# Altium PCB PCB.PcbDoc
Units mm, origin at the board's own origin, x right, y up, seen from the top; angles counter-clockwise.
Board outline 12 x 15 mm, 2 copper layers (Top Layer, Bottom Layer), stack 1.671 mm thick; 12 components, 8 nets, 37 pads, 10 vias.
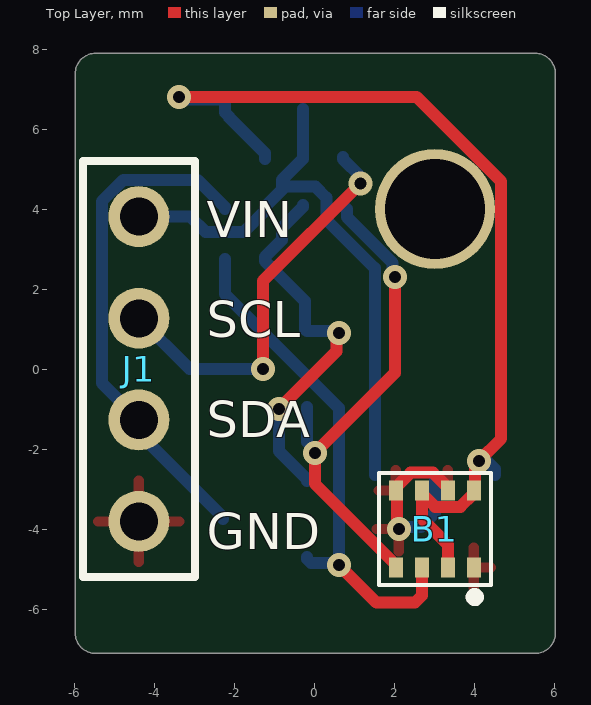
[diagram p0: Top Layer view]
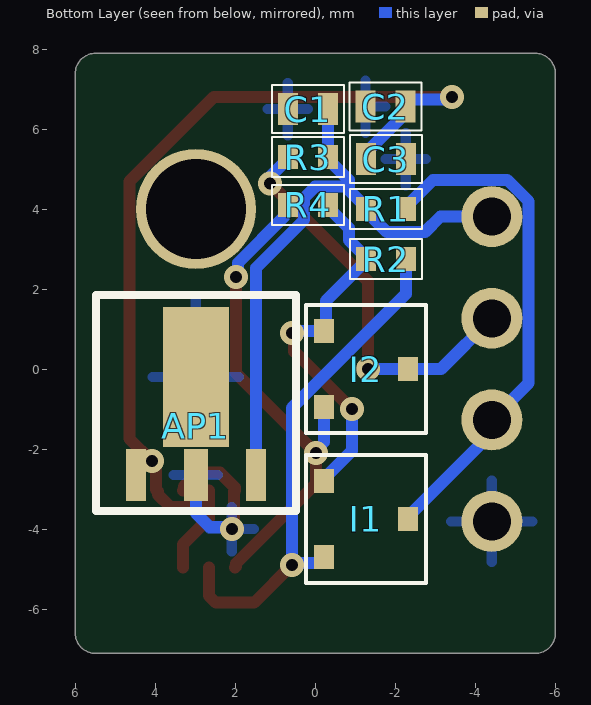
[diagram p1: Bottom Layer view, seen from below]
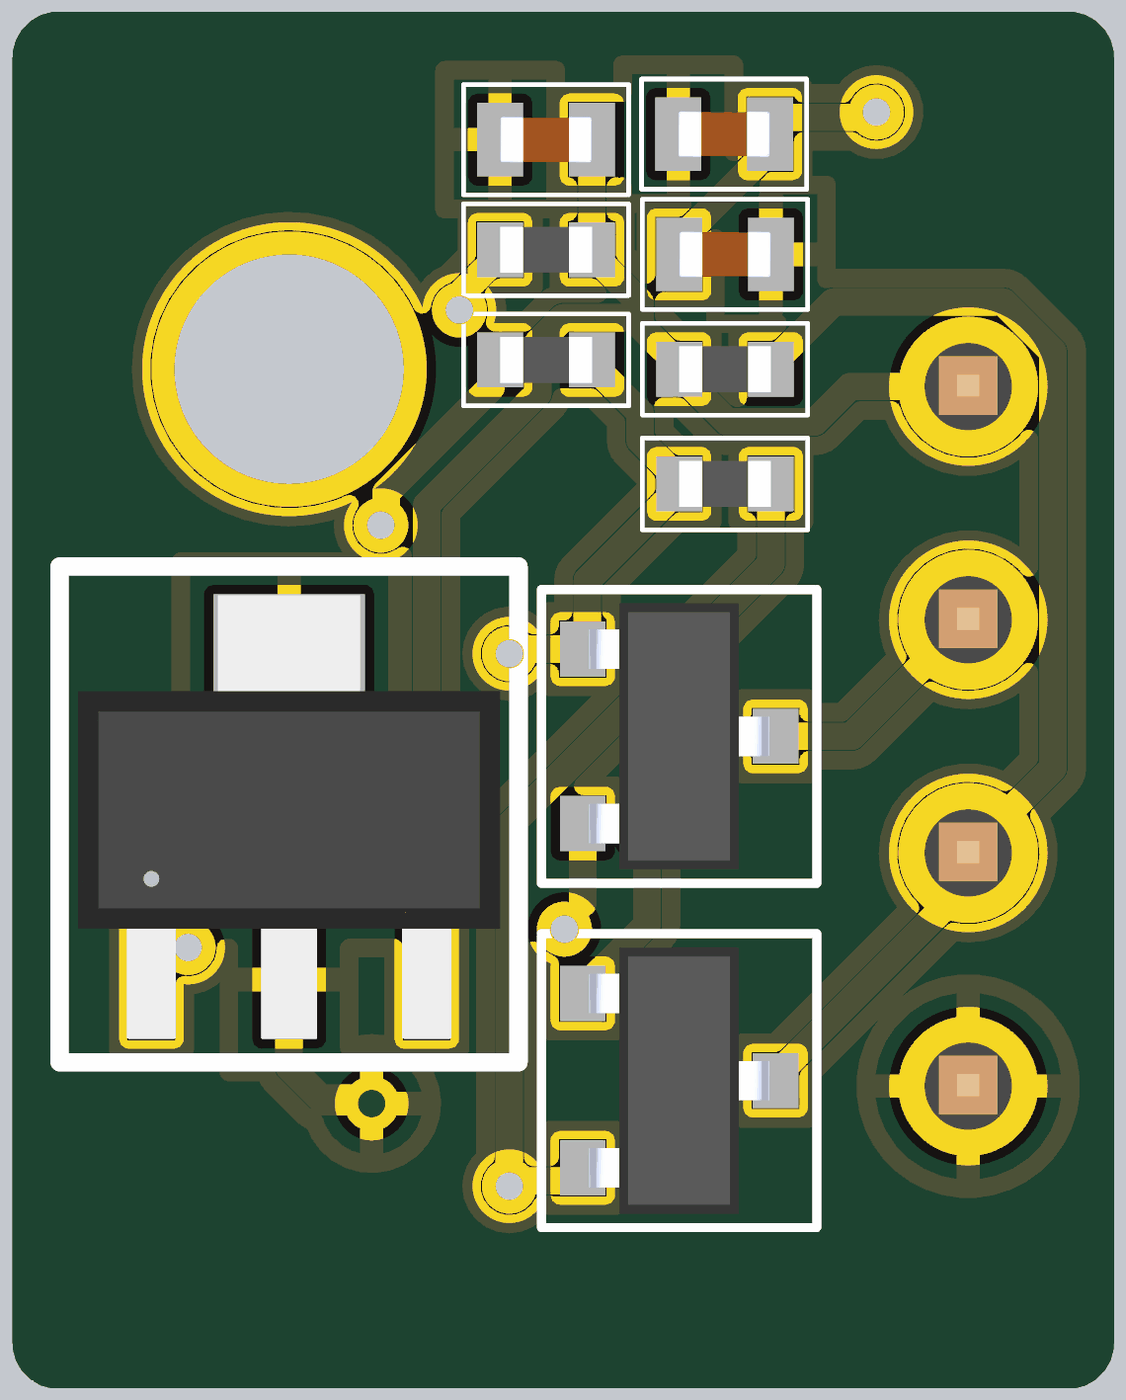
[diagram p2: 3D render of the assembled board from below, using the file's embedded part models]

## Layer stack, top to bottom
Top Solder: solder mask 0.0102, Solder Resist, Dk 3.5
Top Layer: signal copper 0.0356
Dielectric 1: dielectric 1.6, FR-4, Dk 4.8
Bottom Layer: signal copper 0.0356
Bottom Solder: solder mask 0.0102, Solder Resist, Dk 3.5

## Board outline
-5.987,-6.607 -5.987,7.393 cw(c-5.487,7.393) -5.487,7.893 5.513,7.893 cw(c5.513,7.393) 6.013,7.393 6.013,-6.607 cw(c5.513,-6.607) 5.513,-7.107 -5.487,-7.107 cw(c-5.487,-6.607)

## Design rules (kind name [scope] priority, off if disabled: settings)
Clearance [All] p1: gap=0.01 ignorepadtopadclearanceinfootprint=FALSE
HoleSize [All] p1: absolutevalues=TRUE maxlimit=2.54 minlimit=0 maxpercent=80.000 minpercent=20.000
HoleToHoleClearance [All] p1: gap=0 allowstackedmicrovias=TRUE
MinimumSolderMaskSliver [All] p1: minsoldermaskwidth=0
PolygonConnect [All] p1: connectstyle=Relief reliefconductorwidth=0.254 reliefentries=4 polygonreliefangle="90 Angle" airgapwidth=0.254
RoutingVias [All] p1: holewidth=0.3 width=0.6 viastyle="Through Hole" minholewidth=0.3 minwidth=0.6 maxholewidth=0.3 maxwidth=0.6
SilkToSilkClearance [All] p1: silktosilkclearance=0.01
SilkToSolderMaskClearance [IsPad] p1: minsilkscreentomaskgap=0 clearancetoexposedcopper=TRUE
SolderMaskExpansion [All] p1: expansion=0.102 istentingtop=FALSE
Width [All] p1: maxlimit=0.4 minlimit=0.1 preferedwidth=0.3
25 further rules are at their usual default settings.

## Components (designator, comment, footprint, x,y, rotation, side; value= is the part's Value field where it differs from the comment)
AP1 "3.3V Voltage Regulator" "VOLTAGE REGULATOR" 3,-2.65 r180 bottom
B1 "BME280" BME280 3,-4 r270 top
C1 "1uF" "0.1UF CAPCAITOR" 0.2,6.5 r180 bottom
C2 "2.2uF" "22UF CAPACITOR" -1.74,6.56 r180 bottom
C3 "0.1uF" "0.1UF CAPCAITOR" -1.75,5.25 r0 bottom
I1 "BSS138" MOSFET -1.25,-3.75 r270 bottom
I2 "BSS138" MOSFET -1.25,0 r270 bottom
J1 "4x1 HDR" "HEADER 4X1" -4.4,0 r0 top
R1 "10K" "10K RESISTOR" -1.75,4 r0 bottom
R2 "10K" "10K RESISTOR" -1.75,2.75 r0 bottom
R3 "10K" "10K RESISTOR" 0.2,5.3 r180 bottom
R4 "10K" "10K RESISTOR" 0.2,4.1 r180 bottom

## Footprints (in the part's own frame and the unit in brackets; to place one, negate y for a bottom-side part, rotate by r counter-clockwise, add the part's x,y. Pads: shape width x height; smd on the part's side, far side on the other; paste and mask are expansions set on the pad)
"0.1UF CAPCAITOR" [mm]
  rect 0.5x0.8 smd: 1(-0.5,0) 2(0.5,0)
  silkscreen extent -0.9,-0.6 0.9,0.6, body extent -0.5,-0.25 0.5,0.25, height 0.55
"10K RESISTOR" [mm]
  rect 0.5x0.6 smd: 1(-0.5,0) 2(0.5,0)
  silkscreen extent -0.9,-0.5 0.9,0.5, body extent -0.5,-0.25 0.5,0.25, height 0.36
"22UF CAPACITOR" [mm]
  rect 0.5x0.8 smd: 1(-0.5,0) 2(0.5,0)
  silkscreen extent -0.9,-0.6 0.9,0.6, body extent -0.5,-0.25 0.5,0.25, height 0.55
BME280 [mm]
  rect 0.5x0.35 smd: 1(0.965,0.975) 2(0.965,0.325) 3(0.965,-0.325) 4(0.965,-0.975) 5(-0.965,-0.975) 6(-0.965,-0.325) 7(-0.965,0.325) 8(-0.965,0.975)
  silkscreen extent -1.4,-1.4 1.8,1.4, body extent -1.26,-1.24 1.24,1.26, height 1.01
"HEADER 4X1" [mil]
  round 60 hole 37.4: 1(0,150) 2(0,50) 3(0,-50) 4(0,-150)
  silkscreen extent -55,-205 55,205, body extent -50,-200 50,200, height 219
MOSFET [mm]
  rect 0.6x0.5 smd: 1(-0.95,-1.05) 2(0,1.05) 3(0.95,-1.05)
  silkscreen extent -1.6,-1.5 1.6,1.5, body extent -1.45,-1.15 1.45,1.15, height 1.01
"VOLTAGE REGULATOR" [mm]
  rect 0.5x1.3 smd: 1(-1.5,0) 3(1.5,0)
  rect 0.6x1.3 smd: 2(0,0)
  rect 1.65x3.5 smd: 2(0,2.45)
  silkscreen extent -2.5,-0.9 2.5,4.5, body extent -2.3,-0.64 2.3,4.19, height 1.65

## Part data
AP1: library part AP7381-33Y-13, "IC REG LINEAR 3.3V 150MA SOT89", Case/Package=SOT-89, Dropout Voltage=1V, Manufacturer=Diodes, Max Input Voltage=40V, Max Operating Temperature=125°C, Max Supply Current=25uA, Min Operating Temperature=-40°C, Min Output Voltage=3.3V, Output Current=150mA, Quiescent Current=2.5uA, Supplier Part Number 1=AP7381-33Y-13DICT-ND, Category="Voltage Regulators - Linear", ComponentLink1Description=https://www.diodes.com/assets/Datasheets/AP7381.pdf?src-supplier=Digi-Key, ComponentLink1URL=https://www.diodes.com/assets/Datasheets/AP7381.pdf?src-supplier=Digi-Key, Manufacturer Part Number=AP7381-33Y-13, Mount="Surface Mount", Number of Regulators=1, Output Configuration=Positive, Output Type=Fixed, Packaging="Tape and Reel", Pricing 1="1=0.46000, 10=0.34900, 25=0.31440, 100=0.17140, 250=0.16568, 500=0.14854, 1000=0.11427 (USD)", RoHS=Yes, RoHS Compliant=Yes, Stock 1=64223, Supplier 1=Digi-Key
B1: "Pressure, Temperature and Humidity Sensor Digital Output 1.8V 8-Pin LGA T/R", Case/Package=LGA, Manufacturer=Bosch, Max Operating Temperature=85°C, Min Operating Temperature=-40°C, Supplier Part Number 1=828-1063-1-ND, Accuracy=3%, Category="Pressure Sensors", ComponentLink1Description=https://ae-bst.resource.bosch.com/media/_tech/media/product_flyer/BME280_Productflyer_BST_20170109.pdf?src-supplier=Arrow+Electronics, ComponentLink1URL=https://ae-bst.resource.bosch.com/media/_tech/media/product_flyer/BME280_Productflyer_BST_20170109.pdf?src-supplier=Arrow+Electronics, ComponentLink2Description=https://ae-bst.resource.bosch.com/media/_tech/media/datasheets/BST-BME280-DS002.pdf?src-supplier=Digi-Key, ComponentLink2URL=https://ae-bst.resource.bosch.com/media/_tech/media/datasheets/BST-BME280-DS002.pdf?src-supplier=Digi-Key, ComponentLink3Description=https://ae-bst.resource.bosch.com/media/_tech/media/product_flyer/BME280_Productflyer_BST_20170109.pdf?src-supplier=Mouser, ComponentLink3URL=https://ae-bst.resource.bosch.com/media/_tech/media/product_flyer/BME280_Productflyer_BST_20170109.pdf?src-supplier=Mouser, ComponentLink4Description=https://ae-bst.resource.bosch.com/media/_tech/media/product_flyer/BME280_Productflyer_BST_20170109.pdf?src-supplier=NAC+Semi, ComponentLink4URL=https://ae-bst.resource.bosch.com/media/_tech/media/product_flyer/BME280_Productflyer_BST_20170109.pdf?src-supplier=NAC+Semi, Lead Free="Lead Free", Manufacturer Part Number=BME280, Mount="Surface Mount", Number of Pins=8, Output Type=SPI,I2C, Packaging="Cut Tape", Pricing 1="1=5.95000, 5=5.25000, 10=4.63800, 25=3.76240, 50=3.32500, 100=3.23750, 500=2.71250, 1000=2.53750, 5000=2.45000 (USD)", Response Time=1s, RoHS=No, Sensor Type=Temperature, Supplier 1=Digi-Key
C1: library part LMK105BJ105KV-F, "LMK105BJ105KV-F", Case Code (Imperial)=0402, Case Code (Metric)=1005, Dielectric=X5R, Manufacturer="Taiyo Yuden", Max Operating Temperature=85°C, Min Operating Temperature=-55°C, Package Quantity=1, Resistor Type=Ceramic, Supplier Part Number 1=587-1454-1-ND, Tolerance=10%, Voltage Rating=10V, Capacitance=1uF, Case/Package=0402, Category="Ceramic Capacitors", ComponentLink1Description=https://datasheet.ciiva.com/26872/getdatasheetpartid-637441-26872608.pdf?src-supplier=Verical, ComponentLink1URL=https://datasheet.ciiva.com/26872/getdatasheetpartid-637441-26872608.pdf?src-supplier=Verical, ComponentLink2Description=https://datasheet.ciiva.com/15921/463lmk105bj105kv-f-15921218.pdf?src-supplier=Onlinecomponents.com, ComponentLink2URL=https://datasheet.ciiva.com/15921/463lmk105bj105kv-f-15921218.pdf?src-supplier=Onlinecomponents.com, ComponentLink3Description=https://datasheet.ciiva.com/131/lmk105bj105kv-f-ss-131735.pdf?src-supplier=Digi-Key, ComponentLink3URL=https://datasheet.ciiva.com/131/lmk105bj105kv-f-ss-131735.pdf?src-supplier=Digi-Key, ComponentLink4Description=https://datasheet.ciiva.com/30256/308lmk105bj105kv-f-30256903.pdf?src-supplier=Onlinecomponents.com, ComponentLink4URL=https://datasheet.ciiva.com/30256/308lmk105bj105kv-f-30256903.pdf?src-supplier=Onlinecomponents.com, Construction=Flat, Depth=0.5mm, Halogen Free="Halogen Free", Height=0.5mm, Lead Free="Lead Free", Length=1mm, Manufacturer Part Number=LMK105BJ105KV-F, Mount="Surface Mount", Packaging="Tape and Reel", Pricing 1="1=0.11000, 10=0.07900, 50=0.04280, 100=0.03500, 500=0.02502, 1000=0.01966, 2500=0.01788, 5000=0.01644 (USD)", Radiation Hardening=No, REACH SVHC=Unknown, RoHS=Yes, RoHS Compliant=Yes, Series=M, Stock 1=2097360, Supplier 1=Digi-Key, Termination=SMD/SMT, Thickness=0.022inch, Voltage Rating (DC)=10V, Width=0.5mm
C2: library part LMK105BJ225MV-F, "TAIYO YUDEN         LMK105BJ225MV-F            CERAMIC CAPACITOR, 2.2UF, 10V, X5R, 20%, 0402", Case Code (Imperial)=0402, Case Code (Metric)=1005, Dielectric=X5R, Manufacturer="Taiyo Yuden", Max Operating Temperature=85°C, Min Operating Temperature=-55°C, Package Quantity=1, Resistor Type=Ceramic, Supplier Part Number 1=587-3153-1-ND, Tolerance=20%, Voltage Rating=10V, Capacitance=2.2uF, Case/Package=0402, Category="Ceramic Capacitors", ComponentLink1Description=https://datasheet.ciiva.com/30190/500lmk105bj225mv-f-30190498.pdf?src-supplier=Onlinecomponents.com, ComponentLink1URL=https://datasheet.ciiva.com/30190/500lmk105bj225mv-f-30190498.pdf?src-supplier=Onlinecomponents.com, ComponentLink2Description=https://datasheet.ciiva.com/23631/lmk105bj225mv-f-ss-23631491.pdf?src-supplier=Newark, ComponentLink2URL=https://datasheet.ciiva.com/23631/lmk105bj225mv-f-ss-23631491.pdf?src-supplier=Newark, ComponentLink3Description=https://datasheet.ciiva.com/134/lmk105bj225mv-f-ss-134677.pdf?src-supplier=Digi-Key, ComponentLink3URL=https://datasheet.ciiva.com/134/lmk105bj225mv-f-ss-134677.pdf?src-supplier=Digi-Key, ComponentLink4Description=https://datasheet.ciiva.com/15921/286lmk105bj225mv-f-15921222.pdf?src-supplier=Onlinecomponents.com, ComponentLink4URL=https://datasheet.ciiva.com/15921/286lmk105bj225mv-f-15921222.pdf?src-supplier=Onlinecomponents.com, Construction=Flat, Depth=0.5mm, Halogen Free="Halogen Free", Height=0.5mm, Length=1mm, Manufacturer Part Number=LMK105BJ225MV-F, Mount="Surface Mount", Packaging="Tape and Reel", Pricing 1="1=0.10000, 10=0.05800, 50=0.03160, 100=0.02590, 500=0.01848, 1000=0.01452, 2500=0.01320, 5000=0.01214 (USD)", Radiation Hardening=No, REACH SVHC=Unknown, RoHS=Yes, RoHS Compliant=Yes, Series=M, Stock 1=427960, Supplier 1=Digi-Key, Termination=SMD/SMT, Thickness=0.022inch, Voltage Rating (DC)=10V, Width=0.5mm
C3: library part EMK105BJ104KV-F, "TAIYO YUDEN - EMK105BJ104KV-F - CERAMIC CAPACITOR, 0.1UF, 16V, X5R, 10%, 0402, FULL REEL", Capacitance=100nF, Case Code (Imperial)=0402, Case Code (Metric)=1005, Dielectric=X5R, Manufacturer="Taiyo Yuden", Max Operating Temperature=85°C, Min Operating Temperature=-55°C, Package Quantity=1, Resistor Type=Ceramic, Supplier Part Number 1=587-1226-1-ND, Tolerance=10%, Voltage Rating=16V, Case/Package=0402, Category="Ceramic Capacitors", ComponentLink1Description=https://datasheet.ciiva.com/30156/744emk105bj104kv-f-30156673.pdf?src-supplier=Onlinecomponents.com, ComponentLink1URL=https://datasheet.ciiva.com/30156/744emk105bj104kv-f-30156673.pdf?src-supplier=Onlinecomponents.com, ComponentLink2Description=https://datasheet.ciiva.com/30119/255emk105bj104kv-f-30119734.pdf?src-supplier=Onlinecomponents.com, ComponentLink2URL=https://datasheet.ciiva.com/30119/255emk105bj104kv-f-30119734.pdf?src-supplier=Onlinecomponents.com, ComponentLink3Description=https://datasheet.ciiva.com/129/emk105bj104kv-f-ss-129786.pdf?src-supplier=Digi-Key, ComponentLink3URL=https://datasheet.ciiva.com/129/emk105bj104kv-f-ss-129786.pdf?src-supplier=Digi-Key, ComponentLink4Description=https://datasheet.ciiva.com/15920/1135emk105bj104kv-f-15920444.pdf?src-supplier=Onlinecomponents.com, ComponentLink4URL=https://datasheet.ciiva.com/15920/1135emk105bj104kv-f-15920444.pdf?src-supplier=Onlinecomponents.com, ComponentLink5Description=https://datasheet.ciiva.com/5443/mlcc-all-e-541559-5443819.pdf?src-supplier=Mouser, ComponentLink5URL=https://datasheet.ciiva.com/5443/mlcc-all-e-541559-5443819.pdf?src-supplier=Mouser, Construction=Flat, Contact Plating=Tin, Depth=0.5mm, Halogen Free="Halogen Free", Height=0.5mm, Lead Free="Lead Free", Length=1mm, Manufacturer Part Number=EMK105BJ104KV-F, Mount="Surface Mount", Number of Pins=2, Packaging="Tape and Reel", Pricing 1="1=0.10000, 10=0.02100, 50=0.01120, 100=0.00920, 500=0.00654, 1000=0.00514, 2500=0.00468, 5000=0.00430 (USD)", Radiation Hardening=No, REACH SVHC="No SVHC", RoHS=Yes, RoHS Compliant=Yes, Series=M, Stock 1=2258348, Supplier 1=Digi-Key, Termination=SMD/SMT, Thickness=0.022inch, Voltage Rating (DC)=16V, Width=0.02inch
I1 I2: "Trans MOSFET N-CH 50V 0.22A 3-Pin SOT-23 T/R", Case/Package=SOT-23, Continuous Drain Current (ID)=220mA, Drain to Source Breakdown Voltage=50V, Drain to Source Resistance=3.5R, Gate to Source Voltage (Vgs)=20V, Input Capacitance=27pF, Manufacturer="ON Semiconductor / Fairchild", Max Operating Temperature=150°C, Max Power Dissipation=360mW, Min Operating Temperature=-55°C, On-State Resistance=6R, Package Quantity=1, Supplier Part Number 1=BSS138CT-ND, Threshold Voltage=1.3V, Category=MOSFETs, ComponentLink1Description=https://datasheet.ciiva.com/1190/193736-1190130.pdf?src-supplier=Element14, ComponentLink1URL=https://datasheet.ciiva.com/1190/193736-1190130.pdf?src-supplier=Element14, ComponentLink2Description=https://datasheet.ciiva.com/931/bss138-931776.pdf?src-supplier=Digi-Key, ComponentLink2URL=https://datasheet.ciiva.com/931/bss138-931776.pdf?src-supplier=Digi-Key, ComponentLink3Description=https://datasheet.ciiva.com/1190/193736-1190131.pdf?src-supplier=Element14, ComponentLink3URL=https://datasheet.ciiva.com/1190/193736-1190131.pdf?src-supplier=Element14, ComponentLink4Description=https://datasheet.ciiva.com/1254/193736-1254983.pdf?src-supplier=Newark, ComponentLink4URL=https://datasheet.ciiva.com/1254/193736-1254983.pdf?src-supplier=Newark, ComponentLink5Description=https://datasheet.ciiva.com/22655/193736-22655240.pdf?src-supplier=Element14, ComponentLink5URL=https://datasheet.ciiva.com/22655/193736-22655240.pdf?src-supplier=Element14, ComponentLink6Description=https://datasheet.ciiva.com/26229/bss138-26229007.pdf?src-supplier=Avnet+Europe, ComponentLink6URL=https://datasheet.ciiva.com/26229/bss138-26229007.pdf?src-supplier=Avnet+Europe, ComponentLink7Description=https://datasheet.ciiva.com/3304/bss138-3304424.pdf?src-supplier=Avnet, ComponentLink7URL=https://datasheet.ciiva.com/3304/bss138-3304424.pdf?src-supplier=Avnet, ComponentLink8Description=https://datasheet.ciiva.com/16834/bss138-16834843.pdf?src-supplier=Future+Electronics, ComponentLink8URL=https://datasheet.ciiva.com/16834/bss138-16834843.pdf?src-supplier=Future+Electronics, ComponentLink9Description=https://datasheet.ciiva.com/27050/784896-27050043.pdf?src-supplier=Jameco, ComponentLink9URL=https://datasheet.ciiva.com/27050/784896-27050043.pdf?src-supplier=Jameco, Contact Plating=Tin,Matte, Current Rating=220mA, Drain to Source Voltage (Vdss)=50V, Dual Supply Voltage=50V, Element Configuration=Single, Fall Time=9ns, Height=0.93mm, Lead Free="Lead Free", Length=2.92mm, Manufacturer Part Number=BSS138, Mount="Surface Mount", Nominal Vgs=1.3V, Number of Elements=1, Number of Pins=3, Packaging="Tape and Reel", Power Dissipation=360mW, Pricing 1="1=0.26000, 10=0.18200, 25=0.17120, 100=0.08860, 500=0.07392, 1000=0.05136 (USD)", Radiation Hardening=No, Rds On Max=3.5R, REACH SVHC="No SVHC", Rise Time=9ns, RoHS=Yes, Stock 1=395456, Supplier 1=Digi-Key, Termination=SMD/SMT, Turn-Off Delay Time=20ns, Turn-On Delay Time=2.5ns, Voltage Rating (DC)=50V, Weight=0.03g, Width=1.3mm
J1: library part 61300411121, "CONN HEADER VERT 4POS 2.54MM", Color=Black, Manufacturer="Wurth Electronics", Supplier Part Number 1=732-5317-ND, Category=Connectors, ComponentLink1Description=http://www.farnell.com/cad/1737268.pdf?src-supplier=Element14, ComponentLink1URL=http://www.farnell.com/cad/1737268.pdf?src-supplier=Element14, ComponentLink2Description=https://katalog.we-online.de/em/datasheet/6130xx11121.pdf?src-supplier=Digi-Key, ComponentLink2URL=https://katalog.we-online.de/em/datasheet/6130xx11121.pdf?src-supplier=Digi-Key, Connector Type="Male Pin", Contact Material=Copper, Contact Mating Length=0.236inch, Contact Plating=Gold, Gender=Male, Lead Free="Lead Free", Manufacturer Part Number=61300411121, Mount="Through Hole", Number of Contacts=4, Number of Positions=4, Number of Rows=1, Packaging=Bulk, Pitch=0.1inch, Pricing 1="1=0.18000, 10=0.15300, 25=0.12720, 50=0.10600, 100=0.09600, 1000=0.08800 (USD)", REACH SVHC=Unknown, RoHS=Yes, RoHS Compliant=Yes, Stock 1=23286, Supplier 1=Digi-Key, Termination=Solder
R1 R2 R3 R4: library part RMCF0402FT10K0, "RES 10K OHM 1% 1/16W 0402", Case Code (Imperial)=0402, Case Code (Metric)=1005, Manufacturer="Stackpole Electronics", Max Operating Temperature=155°C, Max Power Dissipation=63mW, Min Operating Temperature=-55°C, Power Rating=62.5mW, Resistance=10kR, Resistor Type="Thick Film", Supplier Part Number 1=RMCF0402FT10K0CT-ND, Temperature Coefficient=100ppm/°C, Tolerance=1%, Case/Package=0402, Category="Chip SMD Resistors", ComponentLink1Description=https://datasheet.ciiva.com/24341/sei-rmcp-24341800.pdf?src-supplier=Onlinecomponents.com, ComponentLink1URL=https://datasheet.ciiva.com/24341/sei-rmcp-24341800.pdf?src-supplier=Onlinecomponents.com, Construction=Rectangular, Contact Plating=Tin,Matte, Depth=0.5mm, Features="Automotive AEC-Q200", Height=0.016inch, Lead Free="Lead Free", Length=1mm, Manufacturer Part Number=RMCF0402FT10K0, Military Standard=Not, Mount="Surface Mount", Number of Terminations=2, Packaging="Tape and Reel", Pricing 1="1=0.10000, 10=0.01300, 100=0.00530, 1000=0.00238, 2500=0.00207, 5000=0.00171 (USD)", Radiation Hardening=No, RoHS=Yes, RoHS Compliant=Yes, Series=RMCF, Size Code=0402, Stock 1=6284939, Supplier 1=Digi-Key, Width=0.02inch

## Free pads (board coordinates)
  round 3 hole 2.5: 51(3,4)

## Via types
v1: diameter 0.6, hole 0.3, Top Layer to Bottom Layer, 10 vias

## Nets (pads, with @x,y where several pads share a name; then routed paths per layer and width w, separated by ;. In a path a pad name is that pad's centre, name@x,y a point inside that pad or via, vN(x,y) a via of type N, cw(c..) or ccw(c..) an arc to the next point about the centre after c; other vN are vias at no path point)
+3V3: AP1.1 B1.2 B1.6 B1.8 C2.2 C3.2 | length 24.5
  Top Layer w0.3: v1(-3.4,6.8) 2.548,6.8 4.66,4.688 4.66,-1.74 v1(4.1,-2.3) 4.1,-2.381 4,-2.481 4,-3.01 3.95,-3.06 3.95,-3.135 3.64,-3.445 3.01,-3.445 B1.6@2.675,-3.11 ; B1.6 2.675,-3.735 3.325,-4.385 B1.2
  Bottom Layer w0.3: v1(-3.4,6.8) -3.343,6.743 -2.34,6.743 -2.24,6.643 -2.24,6.41 -2.14,6.31 -2.14,6.29 -1.25,5.4 C3.2 ; v1(4.1,-2.3) 4.2,-2.2 4.5,-2.5 AP1.1
ASCL: I2.2 J1.2 R3.1 | length 10.1
  Top Layer w0.3: v1(-1.3,0) -1.3,2.2 v1(1.144,4.644)
  Bottom Layer w0.3: J1.2 -3.13,0 v1(-1.3,0) ; R3.1 0.7,5.25 1.144,4.806 v1(1.144,4.644)
ASDA: I1.2 J1.3 R1.1 | length 12.8
  Bottom Layer w0.3: I1.2 -2.3,-3.7 -4.4,-1.6 J1.3 -5.322,-0.348 -5.322,4.192 -4.782,4.732 -2.932,4.732 -2.25,4.05 R1.1
BSCL: B1.4 I2.3 R4.1 | length 12.1
  Top Layer w0.3: v1(2,2.3) 2,-0.1 v1(0,-2.1) 0,-2.865 2,-4.865 2,-4.94 B1.4
  Bottom Layer w0.3: -0.2,-1.819 I2.3 ; R4.1 0.8,4 0.8,3.8 1.943,2.657 1.943,2.357 v1(2,2.3)
BSDA: B1.3 I1.3 R2.1 | length 13
  Top Layer w0.3: v1(0.6,-4.9) 1.541,-5.841 2.499,-5.841 2.675,-5.665 B1.3
  Bottom Layer w0.3: R2.1 -2.25,1.876 0.6,-0.974 v1(0.6,-4.9) 0.543,-4.843 -0.1,-4.843 -0.2,-4.743 I1.3
BVCC: I1.1 I2.1 R2.2 R4.2 | length 9.4
  Top Layer w0.3: v1(-0.9,-1) 0.543,0.443 0.543,0.843 v1(0.6,0.9)
  Bottom Layer w0.3: v1(-0.9,-1) -0.9,-2.05 -0.2,-2.75 I1.1 ; R4.2 -0.3,4.05 -0.824,3.526 -0.824,3.226 -1.25,2.8 -1.25,2.7 -0.25,1.7 -0.25,1 I2.1 0.461,0.95 0.505,0.907 0.505,0.9 v1(0.6,0.9)
GND: AP1.2 B1.1 B1.5 B1.7 C1.1 C2.1 C3.1 J1.4 | length 4.8
  Top Layer w0.3: v1(2.1,-4) 2.05,-3.95 2.05,-3.06 B1.5 2.025,-2.96 2.397,-2.588 2.953,-2.588 3.3,-2.935 3.3,-3.01 B1.7
  Bottom Layer w0.3: v1(2.1,-4) 2.157,-3.943 2.657,-3.943 3,-3.6 AP1.2@3,-2.65
VIN: AP1.3 C1.2 J1.1 R1.2 R3.2 | length 15.2
  Bottom Layer w0.3: J1.1 -3.114,3.81 -2.729,3.426 -1.774,3.426 -1.25,3.95 -1.25,4.05 -0.824,4.476 ; C1.2 -0.3,5.25 -0.824,4.726 -0.824,4.476 ; AP1.3 1.5,2.524 0.29,3.734 0.29,4.286 0.016,4.56 -0.74,4.56 -0.824,4.476

## Polygon pours and split planes (outlines as drawn)
GND on Top Layer "NONET_L-01_P-001" (none, remove dead copper, pour order 0): -6,7.893 6.013,7.893 6.013,-7.107 -6,-7.107
GND on Bottom Layer "NONET_L-01_P-001" (none, remove dead copper, pour order 1): -6,7.893 6.013,7.893 6.013,-7.107 -6,-7.107

## Silkscreen, mask and mechanical layers (free items; w line width, h text height)
Top Overlay:
  text "VIN" at -2.7,3.3 h0.9
  text "SCL" at -2.7,0.8 h0.9
  text "SDA" at -2.7,-1.7 h0.9
  text "GND" at -2.7,-4.5 h0.9
Board Outline:
  the board outline again, w0.013